# Altium PCB simrig_controller.PcbDoc
Units mm, origin at the board's own origin, x right, y up, seen from the top; angles counter-clockwise.
Board outline 48 x 48.43 mm, 4 copper layers (L1 (Signal), L2 (GND), L3 (GND), L4 (Signal)), stack 1.591 mm thick; 40 components, 38 nets, 186 pads, 76 vias.
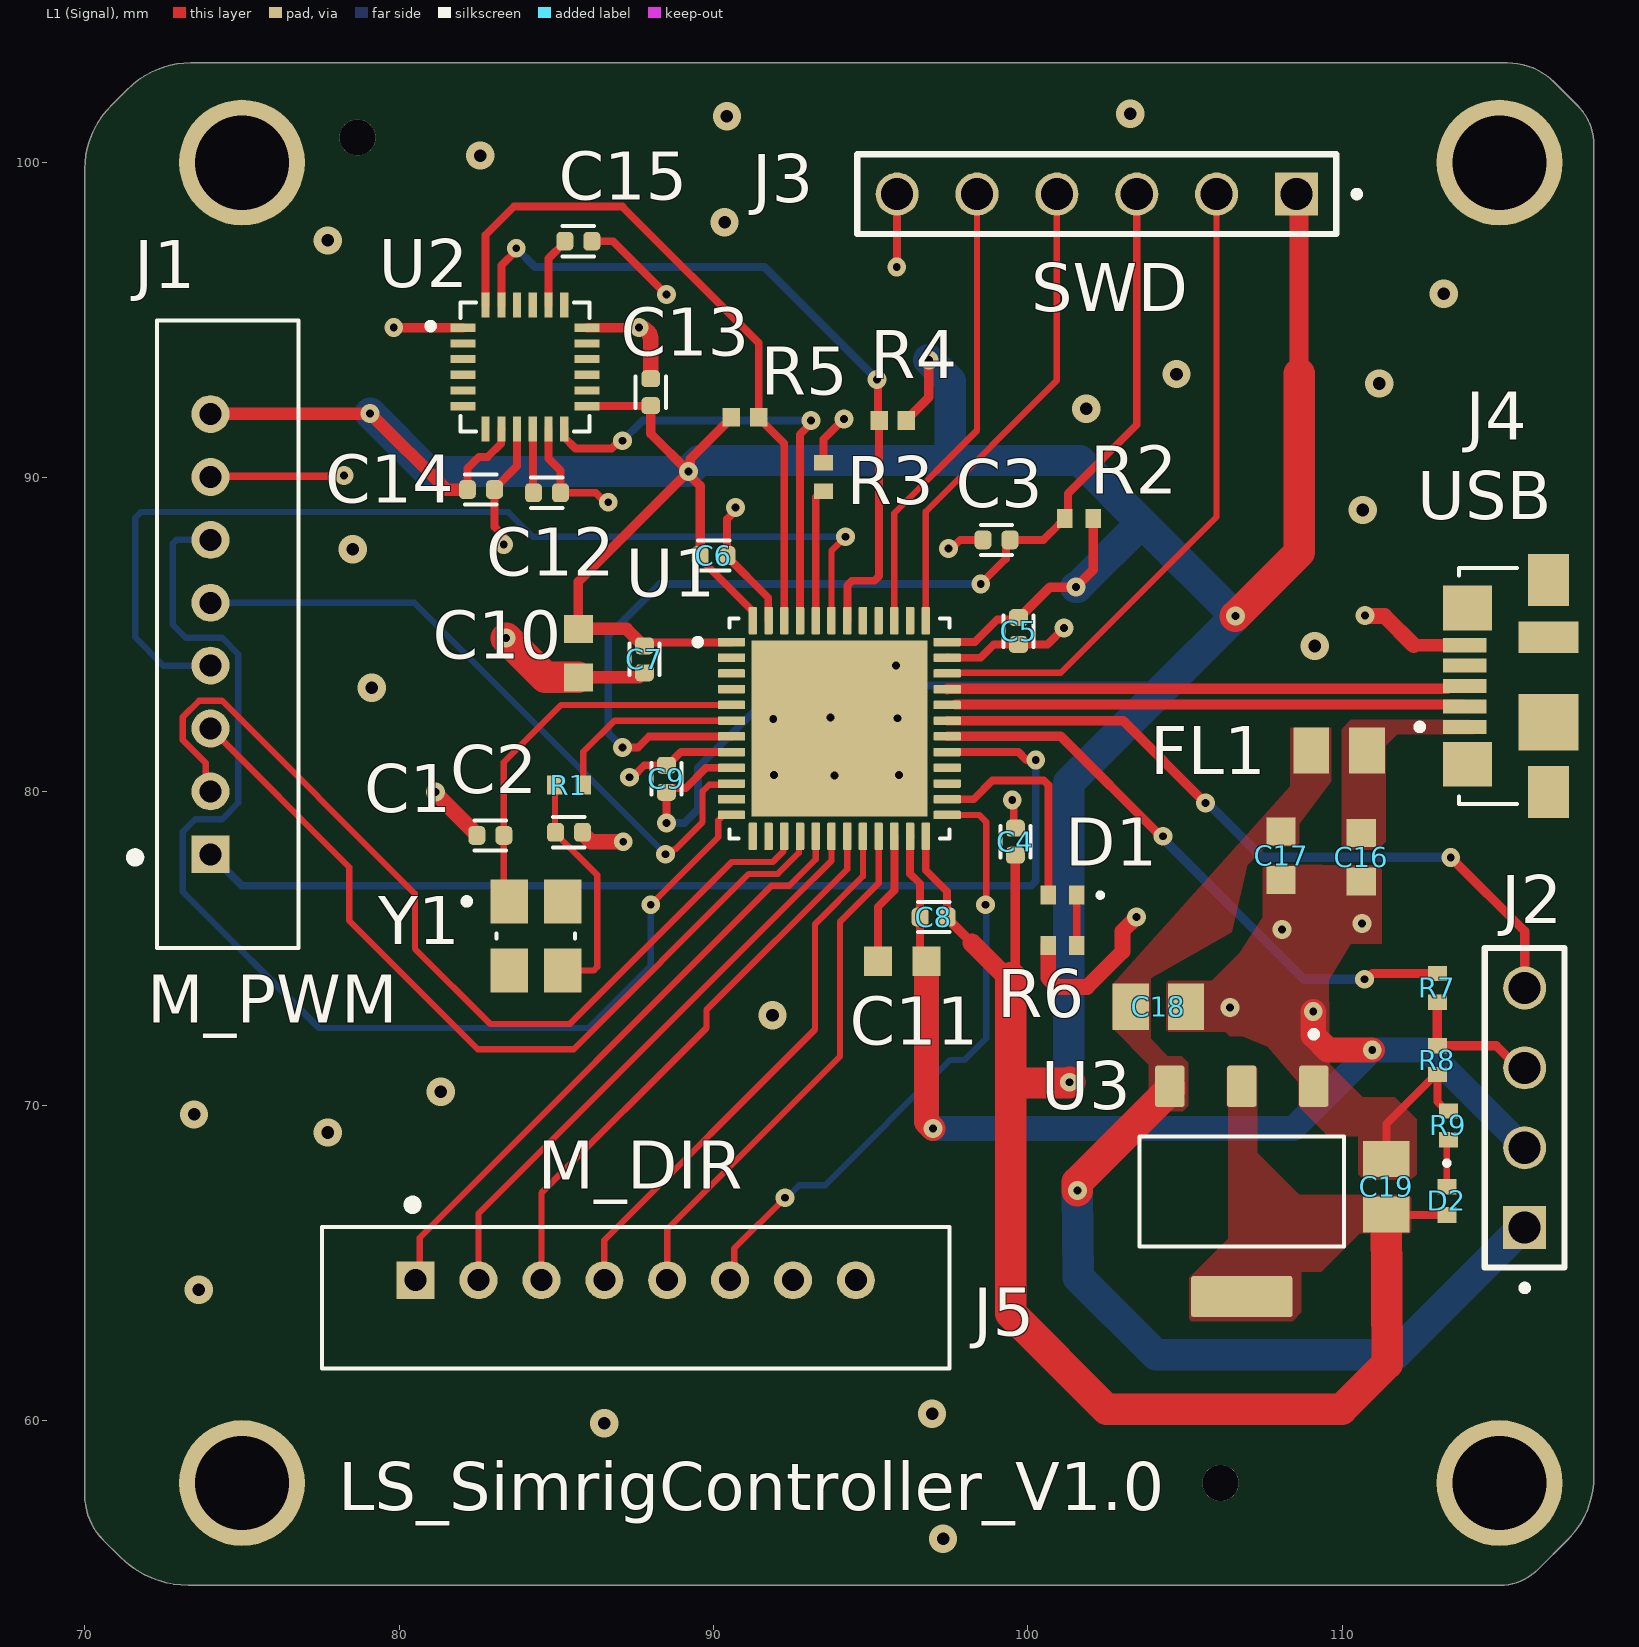
[diagram p0: L1 (Signal) view]
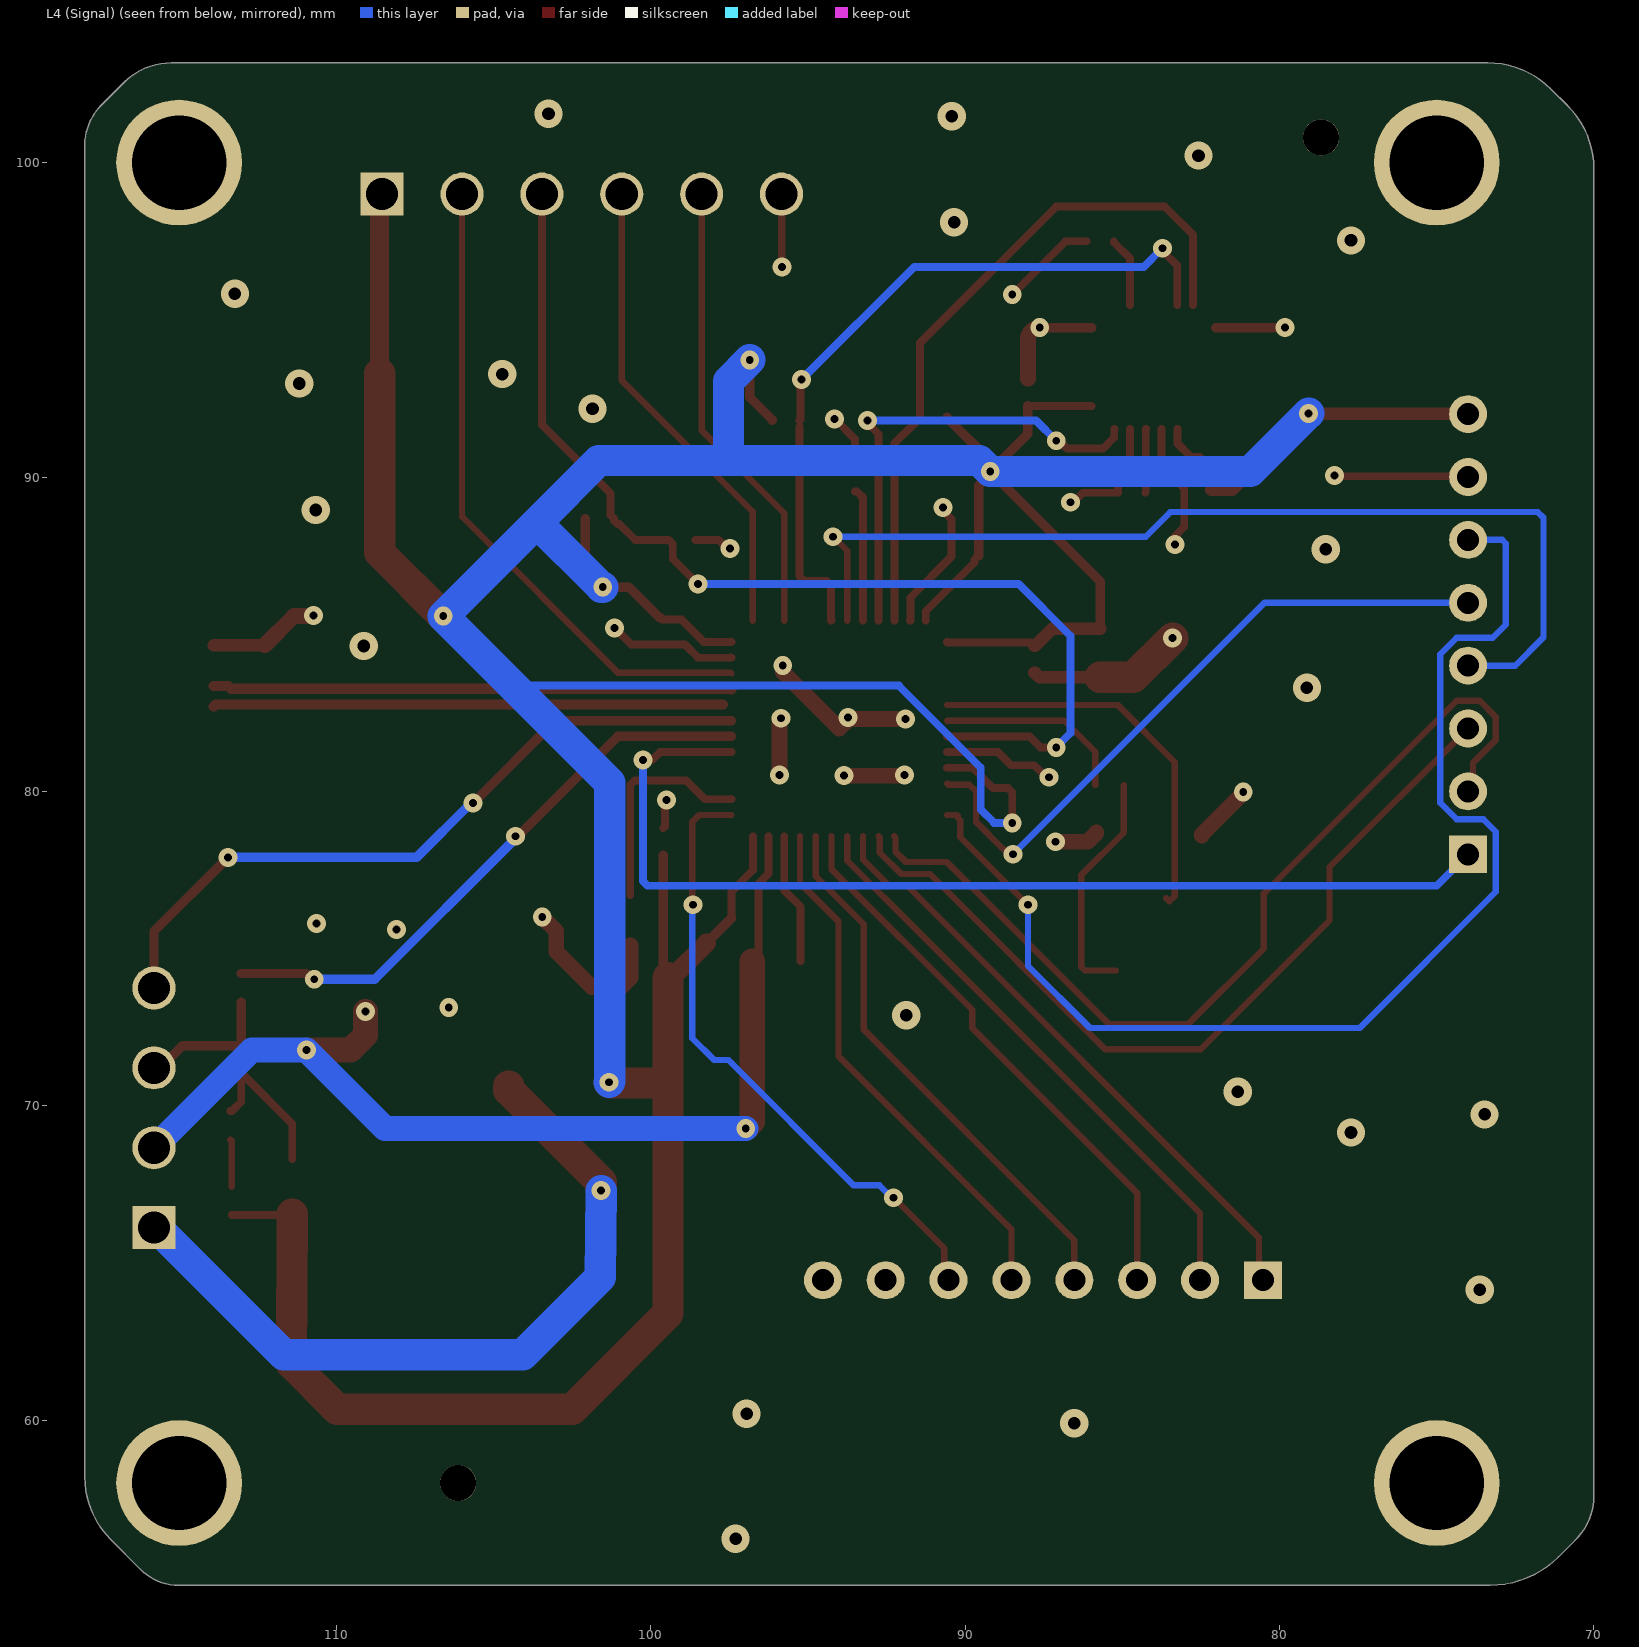
[diagram p1: L4 (Signal) view, seen from below]
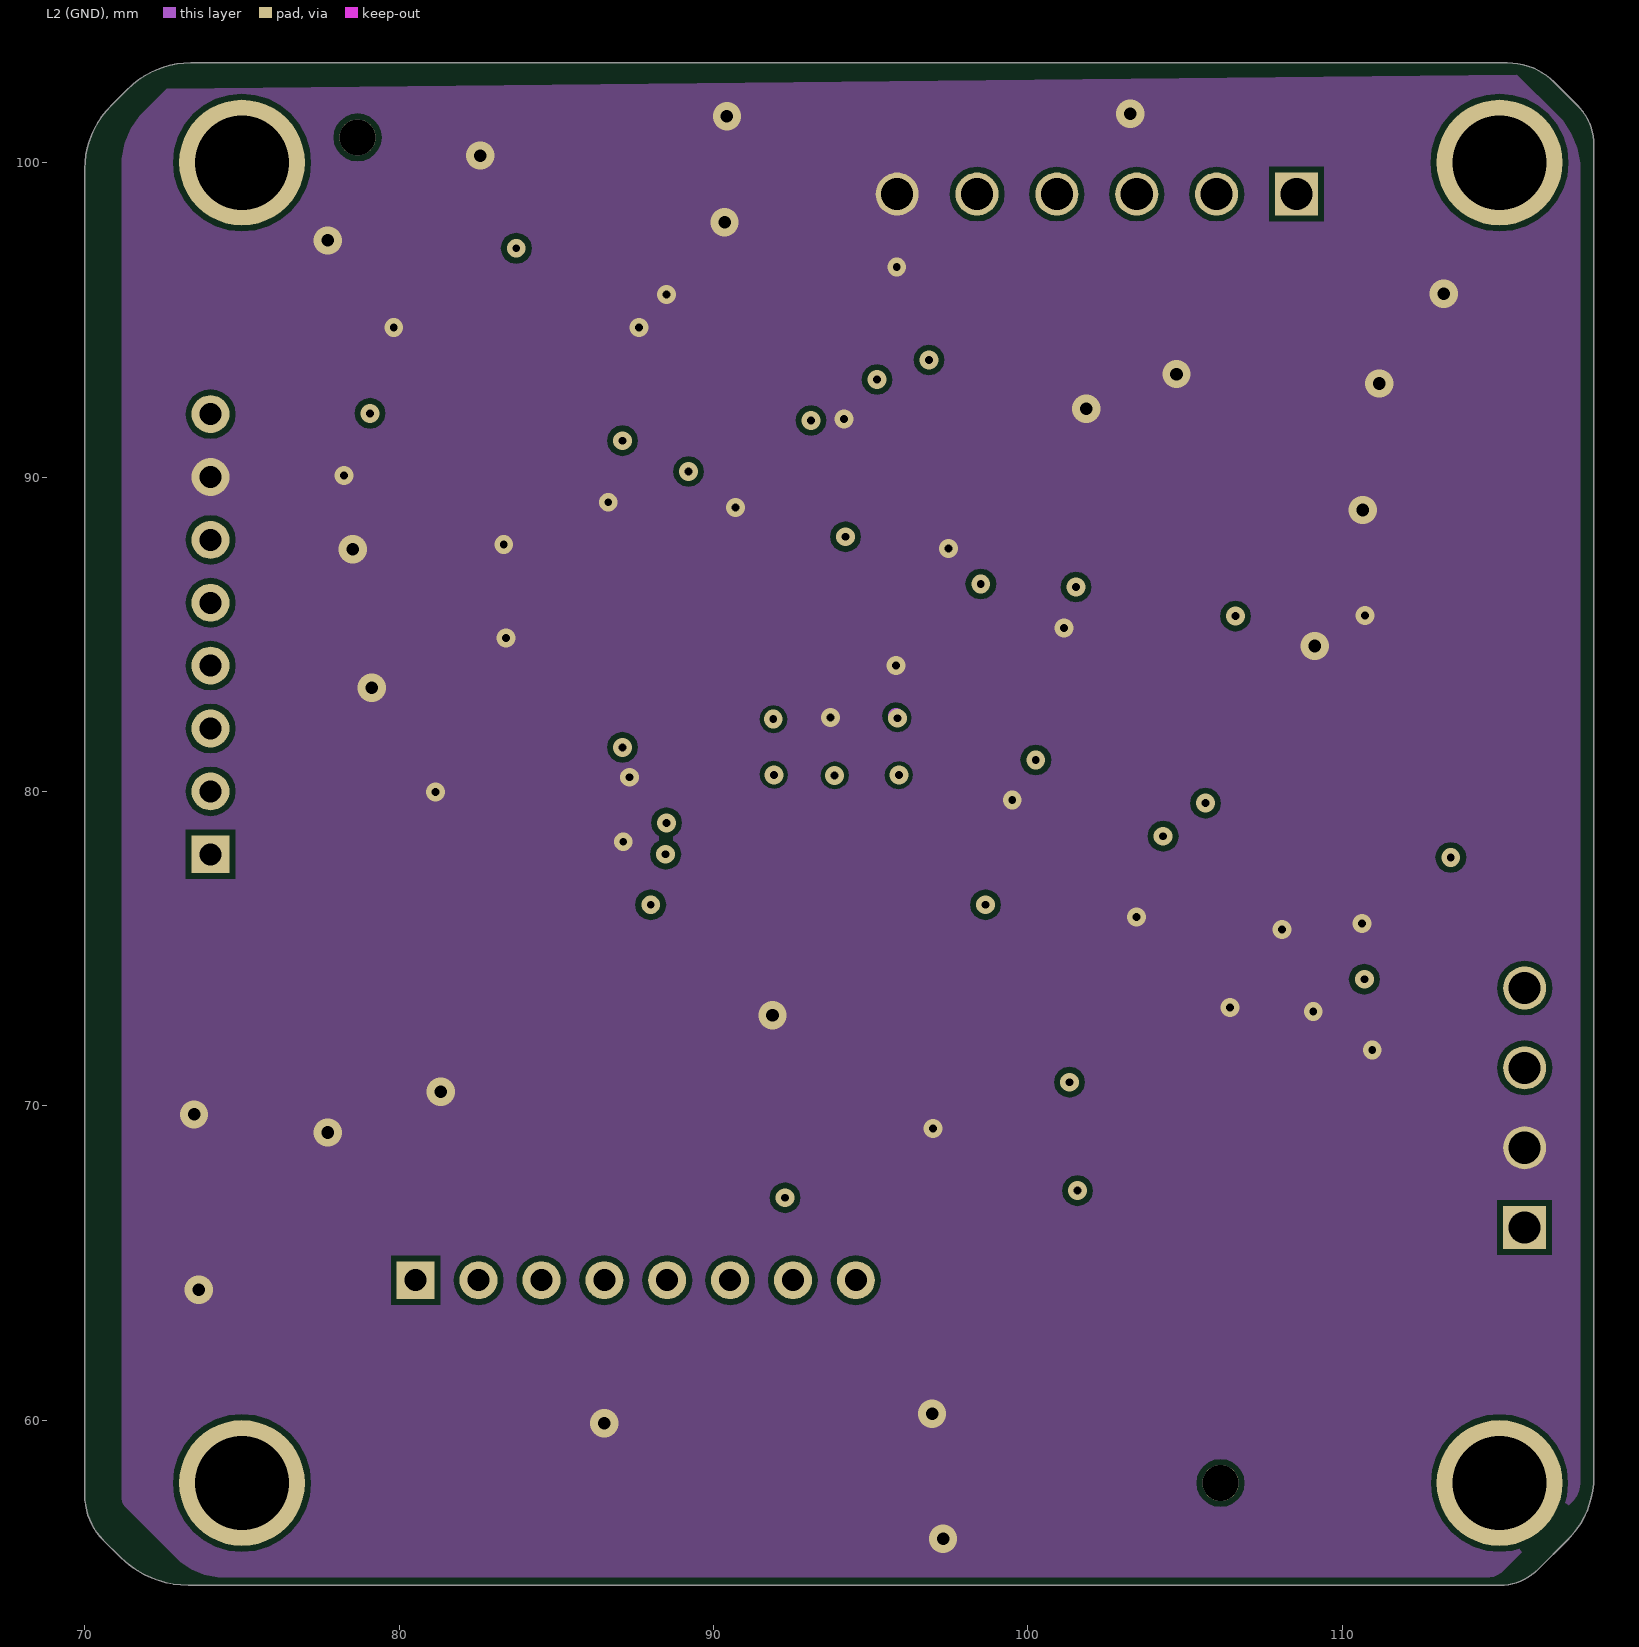
[diagram p2: L2 (GND)]
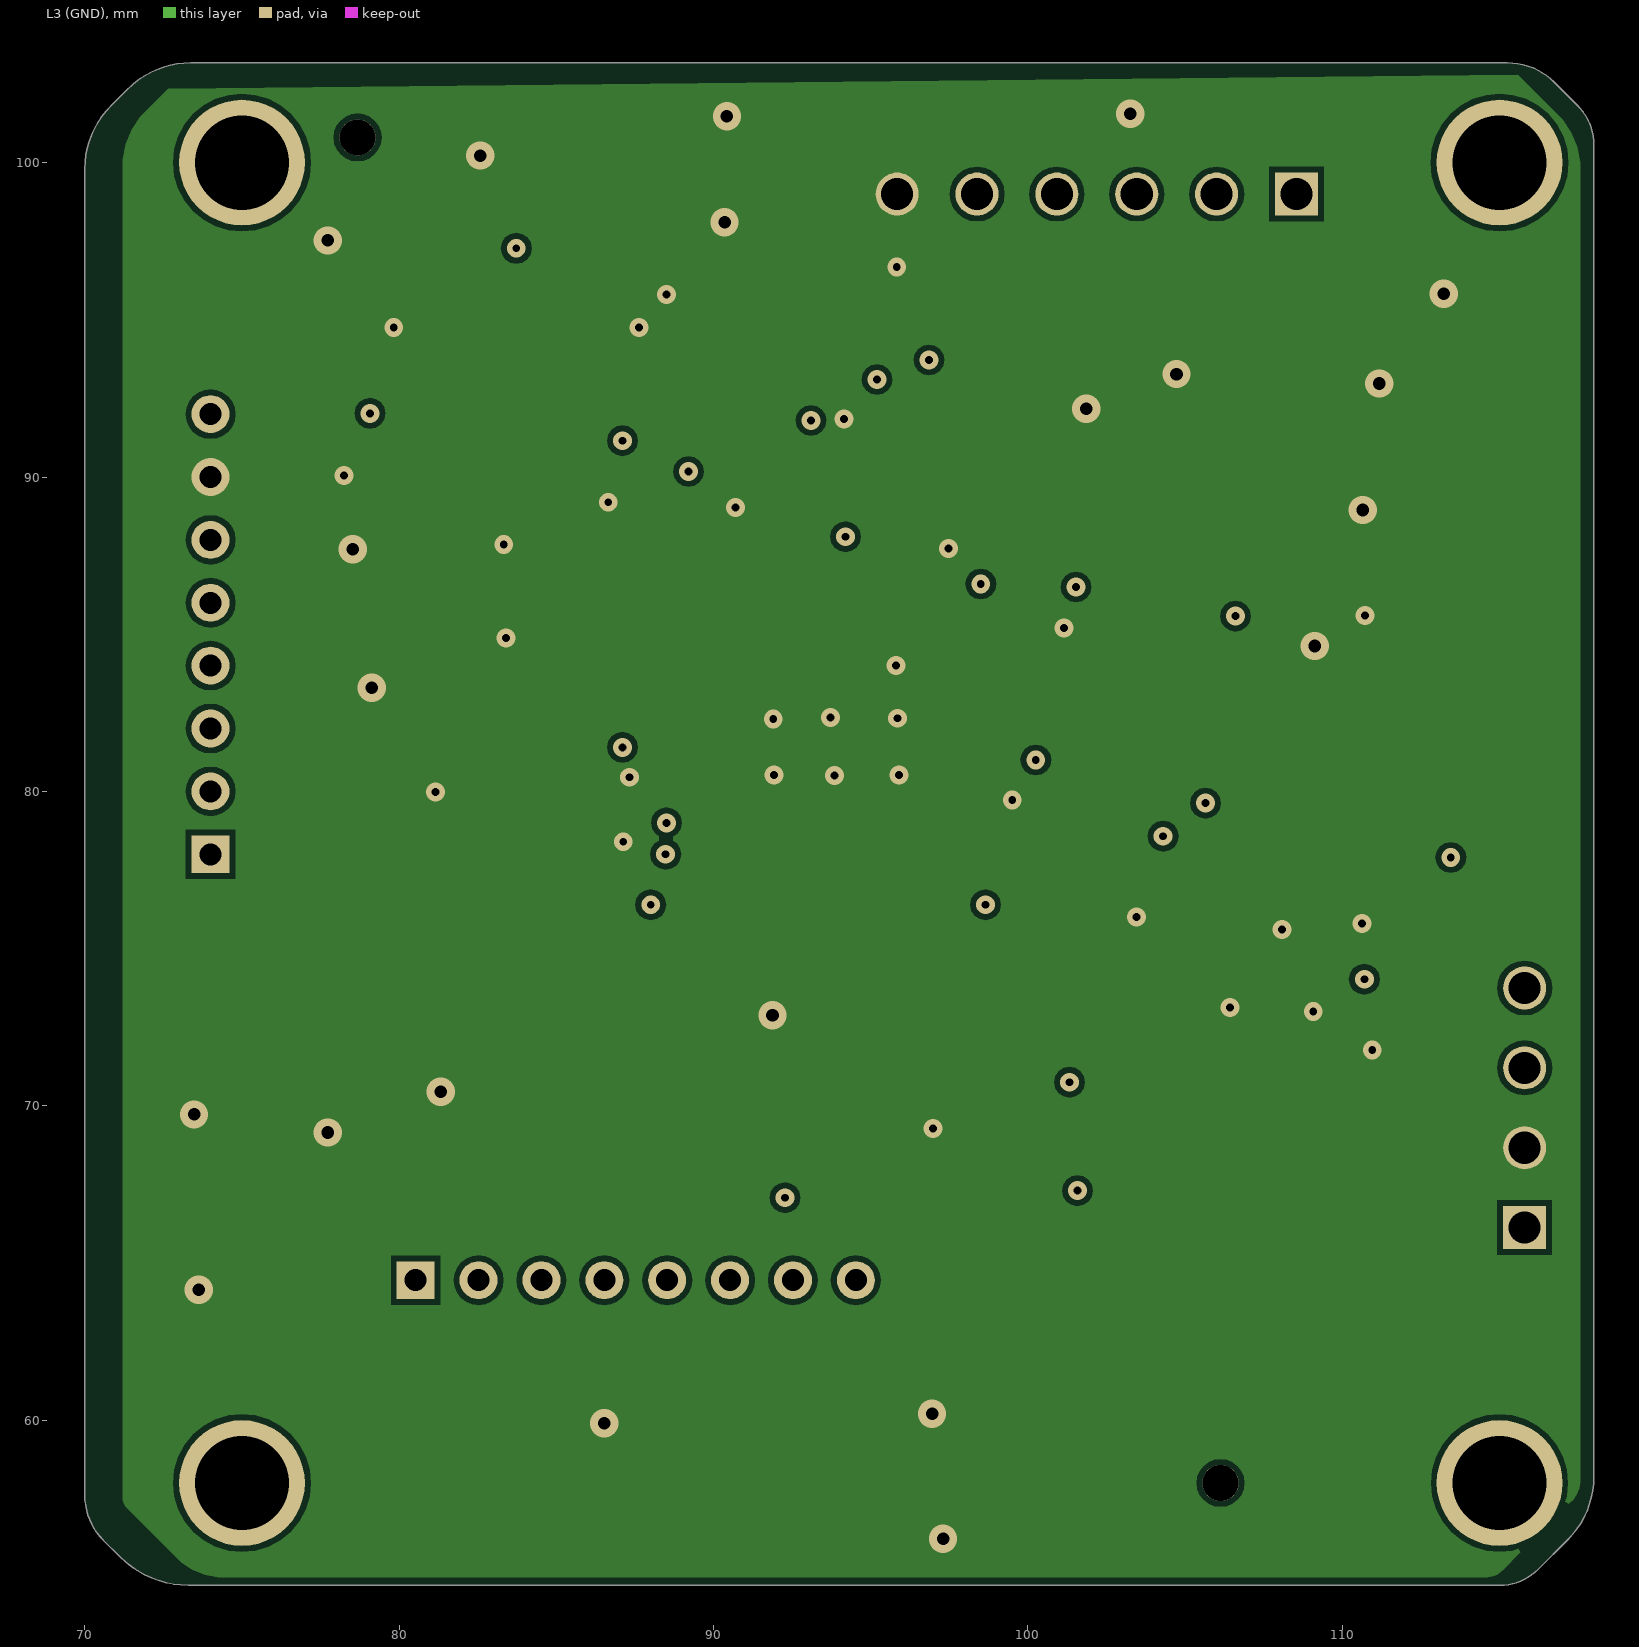
[diagram p3: L3 (GND)]
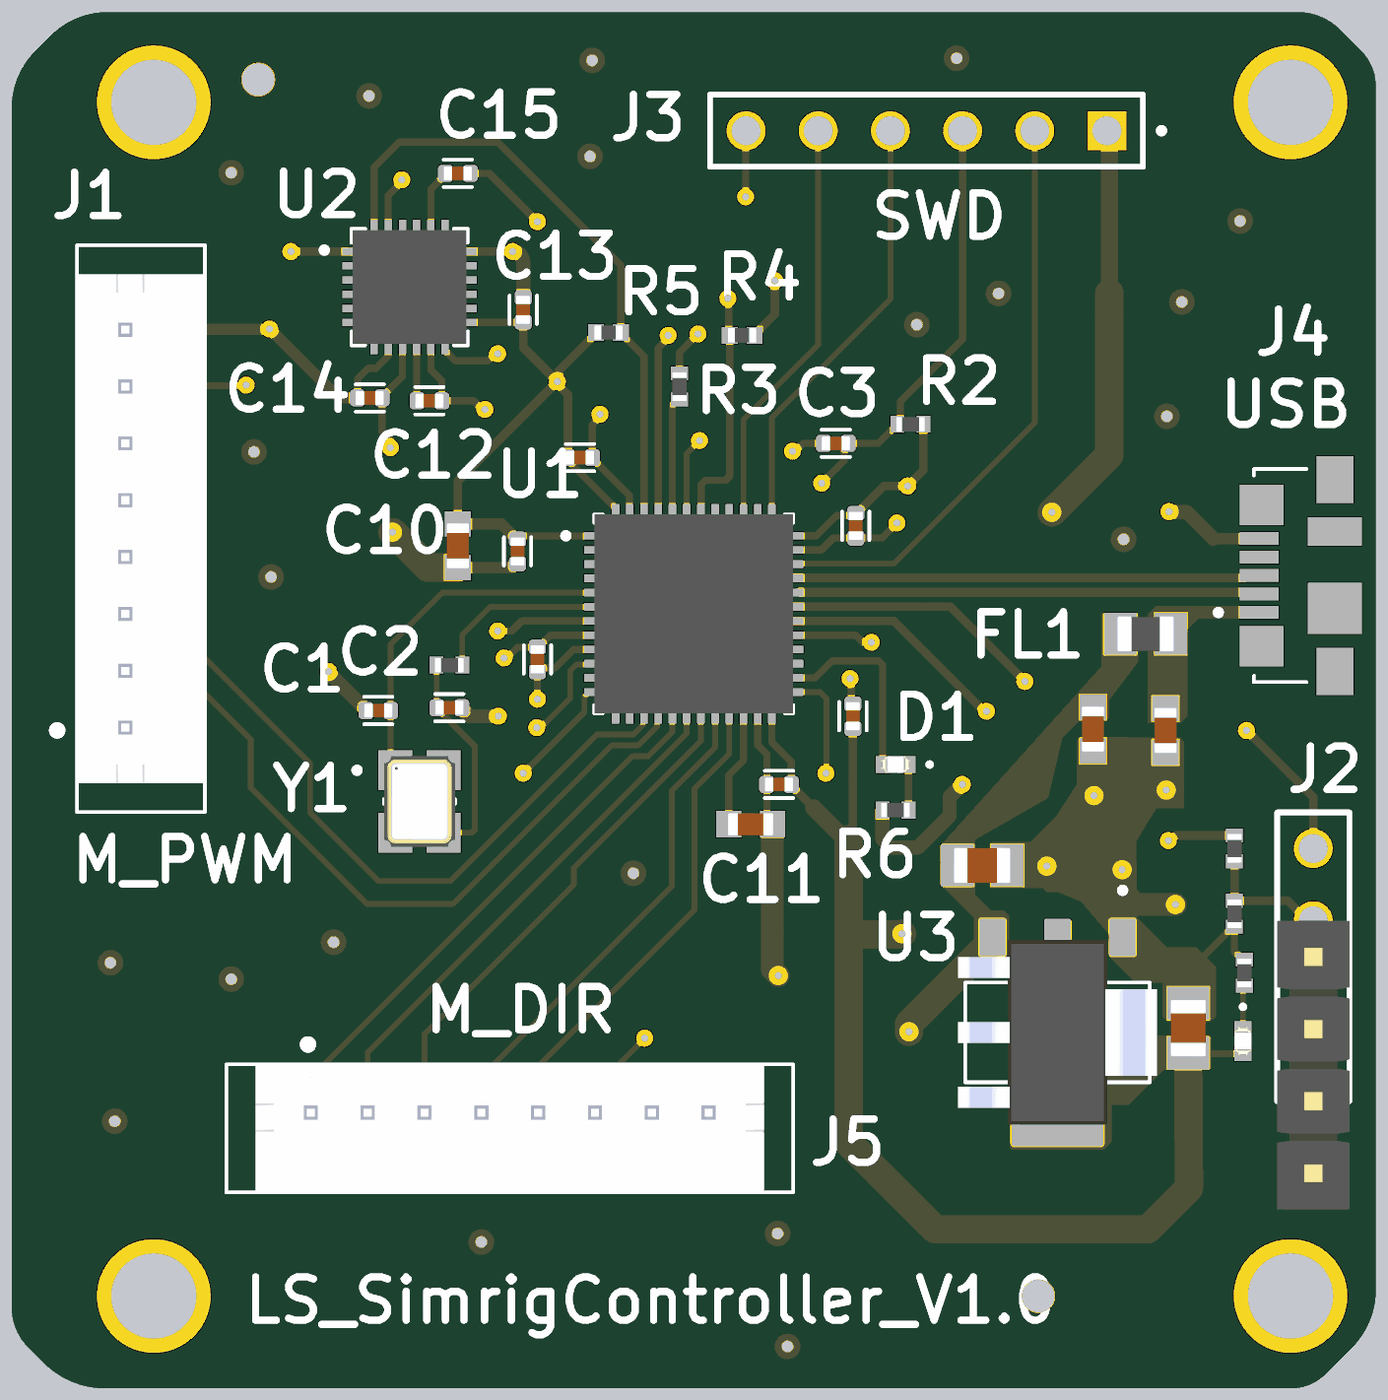
[diagram p4: 3D render of the assembled board from above, using the file's embedded part models]

## Layer stack, top to bottom
Top Solder: solder mask 0.0254, SM-001, Dk 4
L1 (Signal): signal copper 0.035
Dielectric 1: prepreg 0.2104, PP-017, Dk 4.6
L2 (GND): signal copper 0.0175
Dielectric 3: core 1.065, Core-039, Dk 4.6
L3 (GND): signal copper 0.0175
Dielectric 5: prepreg 0.2104, PP-017, Dk 4.6
L4 (Signal): signal copper 0.035
Bottom Solder: solder mask 0.0254, SM-001, Dk 4

## Board outline
70.583,56.192 71.127,55.648 ccw(c73.295,57.816) 73.295,54.75 115.014,54.75 ccw(c115.014,56.466) 116.228,55.253 117.169,56.194 ccw(c115.163,58.2) 118,58.2 118,100.558 ccw(c116.208,100.558) 117.475,101.825 116.744,102.556 ccw(c115.25,101.063) 115.25,103.175 73.375,103.175 ccw(c73.375,100.338) 71.369,102.344 70.831,101.806 ccw(c72.837,99.8) 70,99.8 70,95 70,57.6 ccw(c71.992,57.6)

## Design rules (kind name [scope] priority, off if disabled: settings)
Clearance [All] p1: gap=0.18 ignorepadtopadclearanceinfootprint=FALSE
DiffPairsRouting [All] p1: maxlimit=0.254 minlimit=0.18 mostfreqgap=0.254 toplayer_maxgap=0.203 toplayer_prefgap=0.203 toplayer_minwidth=0.322 toplayer_maxwidth=0.322 toplayer_prefwidth=0.322 bottomlayer_maxgap=0.203 bottomlayer_prefgap=0.203 bottomlayer_minwidth=0.322 bottomlayer_maxwidth=0.322 bottomlayer_prefwidth=0.322 impedanceprofiledriven=TRUE impedanceprofileid={122CBBAE-A731-4727-B2A4-EC5224EE4BFE} impedanceprofilevalue=90.000000 maxuncoupledlength=12.7
PolygonConnect [All] p1: connectstyle=Direct reliefconductorwidth=0.254 reliefentries=4 polygonreliefangle="90 Angle" airgapwidth=0.254
RoutingVias [All] p1: holewidth=0.3 width=0.7 viastyle="Through Hole" minholewidth=0.25 minwidth=0.55 maxholewidth=0.4 maxwidth=0.9
SolderMaskExpansion [All] p1: expansion=0.038 istentingtop=FALSE
UnRoutedNet [All] p1: checkbadconnections=TRUE
Width [All] p1: maxlimit=1 minlimit=0.2 preferedwidth=0.3 minimp=50.000000 maximp=50.000000 favimp=50.000000
28 further rules are at their usual default settings.

## Classes and differential pairs
net class DIFF_USB: USB_D_N USB_D_P
differential pair USB_D: +USB_D_P -USB_D_N

## Components (designator, comment, footprint, x,y, rotation, side; value= is the part's Value field where it differs from the comment)
C1 "10pF" CAPC1005X55N 82.9,78.6 r180 top
C2 "10pF" CAPC1005X55N 85.4,78.7 r0 top
C3 "0.1uF" CAPC1005X55N 99,88 r0 top
C4 "0.1u" CAPC1005X55N 99.6,78.4 r90 top
C5 "0.1u" CAPC1005X55N 99.7,85.1 r270 top
C6 "0.1u" CAPC1005X55N 90,87.5 r0 top
C7 "0.1u" CAPC1005X55N 87.8,84.2 r270 top
C8 "0.1u" CAPC1005X55N 97,76 r180 top
C9 "0.1u" CAPC1005X55N 88.5,80.4 r90 top
C10 "2u2" CAPC1608X90N 85.7,84.4 r90 top
C11 "2u2" CAPC1608X90N 96,74.6 r180 top
C12 "0.1u" CAPC1005X55N 84.7,89.5 r180 top
C13 "0.1u" CAPC1005X55N 88,92.7 r90 top
C14 "0.1u" CAPC1005X55N 82.6,89.6 r0 top
C15 "2n2" CAPC1005X55N 85.7,97.5 r0 top
C16 "2u2" CAPC1608X90N 110.6,77.9 r270 top
C17 "2u2" CAPC1608X90N 108.05,77.95 r270 top
C18 "22u" CAPC2012X145N 104.15,73.15 r0 top
C19 "22u" CAPC2012X145N 111.4,67.425 r90 top
D1 "SML-P11UTT86R" LED_SML-P11UTT86R 101.1,76.7 r180 top
D2 "GREEN" LED_SML-P11UTT86R 113.325,66.975 r270 top
FL1 "BLM21AG121SN1D" BEADC2012X105N 109.9,81.3 r180 top
J1 "B8B-PH-K-S(LF)(SN)" JST_B8B-PH-K-S(LF)(SN) 74,78 r90 top
J2 "DW-04-11-G-S-425" SAMTEC_DW-04-11-G-S-425 115.8,66.125 r90 top
J3 "HW-06-09-F-S-275-110" SAMTEC_HW-06-09-F-S-275-110 108.54,99 r180 top
J4 "47346-0001" MOLEX_47346-0001 116.56,83.35 r90 top
J5 "B8B-PH-K-S(LF)(SN)" JST_B8B-PH-K-S(LF)(SN) 80.525,64.45 r0 top
R1 "0R" RESC1005X37N 85.4,80.2 r180 top
R2 "10k" RESC1005X37N 101.625,88.675 r180 top
R3 "10k" RESC1005X37N 93.5,90 r90 top
R4 "2k2" RESC1005X35N 95.7,91.8 r0 top
R5 "2k2" RESC1005X35N 91,91.9 r180 top
R6 "1k" RESC1005X37N 101.1,75.1 r0 top
R7 "1k" RESC1005X37N 113.025,73.75 r90 top
R8 "2k" RESC1005X37N 113.025,71.45 r270 top
R9 "1k" RESC1005X37N 113.375,69.375 r90 top
U1 "STM32F411CEU6" QFN50P700X700X60-49N 94,82 r0 top
U2 "MPU-6050" QFN50P400X400X95-24N 84,93.5 r0 top
U3 "AMS1117-3.3" SOT229P700X180-4N 106.8,67.275 r270 top
Y1 "24MHz" XTAL_7V24000002 84.35,75.4 r0 top

## Footprints (in the part's own frame and the unit in brackets; to place one, negate y for a bottom-side part, rotate by r counter-clockwise, add the part's x,y. Pads: shape width x height; smd on the part's side, far side on the other; paste and mask are expansions set on the pad)
BEADC2012X105N [mm]
  rect 1.14x1.47 smd: 1(-0.89,0) 2(0.89,0)
  body extent -1,-0.63 1,0.63, height 1.05
CAPC1005X55N [mm]
  rrect53% 0.54x0.6 smd: 1(-0.43,0) 2(0.43,0)
  silkscreen extent -0.5,-0.48 0.5,0.48, body extent -0.5,-0.25 0.5,0.25, height 0.55
CAPC1608X90N [mm]
  rect 0.89x0.93 smd: 1(-0.77,0) 2(0.77,0)
  body extent -0.8,-0.4 0.8,0.4, height 0.9
CAPC2012X145N [mm]
  rect 1.15x1.47 smd: 1(-0.88,0) 2(0.88,0)
  body extent -1,-0.63 1,0.63, height 1.45
JST_B8B-PH-K-S(LF)(SN) [mm]
  rect 1.208x1.208 hole 0.7: 1(0,0)
  round 1.208 hole 0.7: 2(2,0) 3(4,0) 4(6,0) 5(8,0) 6(10,0) 7(12,0) 8(14,0)
  silkscreen extent -2.98,-2.8 16.98,2.54, body extent -1.95,-2.8 15.95,1.7, height 6
LED_SML-P11UTT86R [mm]
  rect 0.5x0.6 smd: A(0.45,0) C(-0.45,0)
  silkscreen extent -1.25,-0.05 -1.15,0.05, body extent -0.5,-0.3 0.5,0.3, height 0.21
MOLEX_47346-0001 [mm]
  rect 0.45x1.38 smd: 1(-1.3,2.66) 2(-0.65,2.66) 3(0,2.66) 4(0.65,2.66) 5(1.3,2.66)
  rect 1.425x1.55 smd: S1(-2.488,2.575) S2(2.488,2.575)
  rect 1.65x1.3 smd: S3(-3.375,0) S6(3.375,0)
  rect 1.8x1.9 smd: S4(-1.15,0)
  rect 1x1.9 smd: S5(1.55,0)
  silkscreen extent -3.75,1 3.75,4.2
QFN50P400X400X95-24N [mm]
  rect 0.79x0.26 smd: 1(-1.97,1.25) 2(-1.97,0.75) 3(-1.97,0.25) 4(-1.97,-0.25) 5(-1.97,-0.75) 6(-1.97,-1.25) 13(1.97,-1.25) 14(1.97,-0.75) 15(1.97,-0.25) 16(1.97,0.25) 17(1.97,0.75) 18(1.97,1.25)
  rect 0.26x0.79 smd: 7(-1.25,-1.97) 8(-0.75,-1.97) 9(-0.25,-1.97) 10(0.25,-1.97) 11(0.75,-1.97) 12(1.25,-1.97) 19(1.25,1.97) 20(0.75,1.97) 21(0.25,1.97) 22(-0.25,1.97) 23(-0.75,1.97) 24(-1.25,1.97)
  silkscreen extent -3.1,-2.05 2.05,2.05, body extent -2,-2 2,2, height 0.93
QFN50P700X700X60-49N [mm]
  rrect25% 0.87x0.27 smd: 1(-3.43,2.75) 2(-3.43,2.25) 3(-3.43,1.75) 4(-3.43,1.25) 5(-3.43,0.75) 6(-3.43,0.25) 7(-3.43,-0.25) 8(-3.43,-0.75) 9(-3.43,-1.25) 10(-3.43,-1.75) 11(-3.43,-2.25) 12(-3.43,-2.75) 25(3.43,-2.75) 26(3.43,-2.25) 27(3.43,-1.75) 28(3.43,-1.25) 29(3.43,-0.75) 30(3.43,-0.25) 31(3.43,0.25) 32(3.43,0.75) 33(3.43,1.25) 34(3.43,1.75) 35(3.43,2.25) 36(3.43,2.75)
  rrect25% 0.27x0.87 smd: 13(-2.75,-3.43) 14(-2.25,-3.43) 15(-1.75,-3.43) 16(-1.25,-3.43) 17(-0.75,-3.43) 18(-0.25,-3.43) 19(0.25,-3.43) 20(0.75,-3.43) 21(1.25,-3.43) 22(1.75,-3.43) 23(2.25,-3.43) 24(2.75,-3.43) 37(2.75,3.43) 38(2.25,3.43) 39(1.75,3.43) 40(1.25,3.43) 41(0.75,3.43) 42(0.25,3.43) 43(-0.25,3.43) 44(-0.75,3.43) 45(-1.25,3.43) 46(-1.75,3.43) 47(-2.25,3.43) 48(-2.75,3.43)
  rect 5.6x5.6 smd paste-4: 49(0,0)
  silkscreen extent -4.6,-3.5 3.5,3.5, body extent -3.5,-3.5 3.5,3.5, height 0.6
RESC1005X35N [mm]
  rect 0.56x0.6 smd: 1(-0.435,0) 2(0.435,0)
  body extent -0.5,-0.25 0.5,0.25, height 0.35
RESC1005X37N [mm]
  rect 0.49x0.6 smd: 1(-0.457,0) 2(0.457,0)
  body extent -0.5,-0.25 0.5,0.25, height 0.37
SAMTEC_DW-04-11-G-S-425 [mm]
  rect 1.37x1.37 hole 1.02: 01(0,0)
  round 1.37 hole 1.02: 02(2.54,0) 03(5.08,0) 04(7.62,0)
  silkscreen extent -2.02,-1.27 8.89,1.27, body extent -5.08,-1.27 5.08,1.27, height 20.83
SAMTEC_HW-06-09-F-S-275-110 [mm]
  rect 1.37x1.37 hole 1.02: 01(0,0)
  round 1.37 hole 1.02: 02(2.54,0) 03(5.08,0) 04(7.62,0) 05(10.16,0) 06(12.7,0)
  silkscreen extent -2.02,-1.27 13.97,1.27
SOT229P700X180-4N [mm]
  rrect15% 1.31x0.93 smd: 1(-3.345,2.29) 2(-3.345,0) 3(-3.345,-2.29)
  rrect15% 1.31x3.24 smd: 4(3.345,0)
  silkscreen extent -5.1,-3.25 1.75,3.25, body extent -3.25,-3.5 3.25,3.5, height 1.8
XTAL_7V24000002 [mm]
  rect 1.2x1.4 smd: 1(-0.85,1.1) 2(-0.85,-1.1) 3(0.85,-1.1) 4(0.85,1.1)
  silkscreen extent -2.3,-0.08 1.25,1.2, body extent -1.25,-1.6 1.25,1.6, height 0.9

## Part data
C1 C2: library part CC0402JRNPO9BN100, "CERAMIC CAPACITOR 10PF 50V, C0G, 5%, 0402, FULL REEL", Package=None, Availability=Unavailable, MF="{'manufacturer': u'Yageo'}", MP=CC0402JRNPO9BN100, Price=None
C3 C4 C5 C6 C7 C8 C9 C12 C13 C14 C15: library part C0402C104K4RALTU, "CAP CER 0.1UF 16V 10% X7R 0402", Package=None, Availability=Unavailable, MF="{'manufacturer': u'KEMET'}", MP=C0402C104K4RALTU, Price=None
C10 C11 C16 C17: library part GRM188R61E225MA12D, Package=None, Availability=Unavailable, MF="{'manufacturer': u'Murata'}", MP=GRM188R61E225MA12D, Price=None
C18 C19: library part C2012X6S1C226M125AC, "22ÂµF Â±20% 16V Ceramic Capacitor X6S 0805 (2012 Metric)", Package=None, Availability=Unavailable, MF="{'manufacturer': u'TDK'}", MP=C2012X6S1C226M125AC, Price=None
D1: "LED, PICOLED, Red, 621 nm, 1.8 V, 1 mA, 2.5 mcd", Package=None, Availability=Unavailable, MF="{'manufacturer': u'Rohm'}", MP=SML-P11UTT86R, Price=None
D2: library part SML-P12PTT86, "LED Uni-Color Green 2-Pin SMD T/R", Package=None, Availability=Unavailable, MF="{'manufacturer': u'Rohm'}", MP=SML-P12PTT86, Price=None
FL1: "FERRITE BEAD, 0805 CASE, 120OHM; Inductor Type:Ferrite Bead; Series:BLM21; Resistance:0.15ohm; DC Current Max:200mA; Case Style:0805; Core Material:Ferrite; Temp, Op. Max:+125Â°C; Temp, Op. Min:-55Â°C; Typ Impedance @ 100MHz:120ohm", Package=None, Availability=Unavailable, MF="{'manufacturer': u'Murata'}", MP=BLM21AG121SN1D, Price=None
J1 J5: "PH Series 2 mm Pitch 8 Position Through Hole Top Entry Shrouded Header", Package=None, Availability=Unavailable, MF="{'manufacturer': u'JST Sales'}", MP=B8B-PH-K-S(LF)(SN), Price=None
J2 J3 U3: Package=None, Availability=Unavailable, Price=None
  J2: MF="{'manufacturer': u'Samtec'}", MP=DW-04-11-G-S-425
  J3: MF="{'manufacturer': u'Samtec'}", MP=HW-06-09-F-S-275-110
  U3: MF="{'manufacturer': u'ams AG'}", MP=AMS1117-3.3
J4: "USB Connectors MICRO USB B RECPT BTTM MOUNT ASSY", Package=None, Availability=Unavailable, MF="{'manufacturer': u'Molex'}", MP=47346-0001, Price=None
R1 R2 R3 R6 R7 R8 R9: library part MCS04020D1002BE000, Package=None, Availability=Unavailable, MF="{'manufacturer': u'Vishay'}", MP=MCS04020D1002BE000, Price=None
R4 R5: library part RT0402BRB072K2L, "RES SMD 2.2K OHM 0.1% 1/16W 0402", Package=None, Availability=Unavailable, MF="{'manufacturer': u'Yageo'}", MP=RT0402BRB072K2L, Price=None
U1: "High-performance access line, ARM Cortex-M4 core with DSP and FPU, 512 Kbytes Flash, 100 MHz CPU, ART Accelerator", Package=None, Availability=Unavailable, MF="{'manufacturer': u'STMicroelectronics'}", MP=STM32F411CEU6, Price=None
U2: "MPU-6050 Six-Axis (Gyro + Accelerometer) MEMS MotionTrackingâ„¢ Devices", Package=None, Availability=Unavailable, MF="{'manufacturer': u'TDK InvenSense'}", MP=MPU-6050, Price=None
Y1: library part 7V24000002, Package=None, Availability=Unavailable, MF="{'manufacturer': u'TXC CORPORATION'}", MP=7V24000002, Price=None

## Free pads (board coordinates)
  round 4 hole 3: 1(75,100) 2(75,58) 3(115,100) 4(115,58)
  round 1.152 hole 1.152: TH(78.675,100.8) TH(106.125,58)

## Via types
v1: diameter 0.6, hole 0.25, L1 (Signal) to L4 (Signal), 55 vias
v2: diameter 0.9, hole 0.4, L1 (Signal) to L4 (Signal), tented both sides, 21 vias

## Nets (pads, with @x,y where several pads share a name; then routed paths per layer and width w, separated by ;. In a path a pad name is that pad's centre, name@x,y a point inside that pad or via, vN(x,y) a via of type N, cw(c..) or ccw(c..) an arc to the next point about the centre after c; other vN are vias at no path point)
+3V3: C4.1 C5.1 C6.1 C7.1 C8.1 C9.1 C10.2 C13.1 C14.1 C19.1 D2.A J1.8 J3.01 R2.1 R4.2 R5.2 U1.1 U1.9 U1.24 U1.36 U1.48 U2.8 U2.13 U3.2 U3.4 | length 178.1
  L1 (Signal) w0.25: C14.1 82.17,90.275 82.537,90.642 82.818,90.642 83.245,91.069 83.245,91.525 U2.8 ; U2.13 85.975,92.255 87.985,92.255 C13.1 ; C7.1 87.91,84.74 90.56,84.74 U1.1 ; v1(88.5,79) C9.1 88.634,80.104 89.114,80.104 89.76,80.75 U1.9 ; C6.1 89.704,87.366 89.704,87.276 91.25,85.73 U1.48 ; U1.24 96.75,77.49 97.43,76.81 C8.1 ; U1.36 98.31,84.75 99.025,85.465 99.635,85.465 C5.1 ; C19.1 111.42,66.525 D2.A
  L1 (Signal) w0.3: C10.2 85.7,86.675 v1(89.2,90.175) ; C13.1 88,91.375 v1(89.2,90.175) ; C6.1 89.57,89.724 89.2,90.094 v1(89.2,90.175) ; R5.2 90.565,91.88 89.257,90.572 89.257,90.232 v1(89.2,90.175) ; R4.2 96.135,91.82 96.85,92.535 v1(96.85,93.725) ; C8.1 97.43,75.97 98.225,75.175 ; 99.325,74.075 99.6,74.35 C4.1 ; C5.1 99.73,85.53 100.7,86.5 v1(101.525,86.5) 102.082,87.057 R2.1
  L1 (Signal) w0.4: J1.8 74.012,92.012 79.062,92.012 v1(79.075,92.025) 81.5,89.6 C14.1 ; C10.2 87.23,85.17 87.77,84.63 C7.1
  L1 (Signal) w0.6: 98.225,75.175 99.325,74.075 99.45,74.075 ; J3.01 108.625,98.915 108.625,93.292
  L1 (Signal) w1: 99.45,74.075 99.45,70.725 ; v1(101.325,70.75) 101.3,70.725 99.45,70.725 ; v1(106.6,85.575) 108.625,87.6 108.625,93.292 ; C19.1 111.425,61.8 109.975,60.35 102.5,60.35 99.45,63.4 99.45,70.725
  L4 (Signal) w0.25: v1(88.5,79) 89.075,79 89.5,79.425 89.5,80.756 92.107,83.363 104.388,83.363
  L4 (Signal) w1: v1(79.075,92.025) 80.925,90.175 v1(89.2,90.175) 89.55,90.525 97.525,90.525 ; v1(96.85,93.725) 97.525,93.05 97.525,90.525 ; v1(101.325,70.75) 101.3,70.775 101.3,80.275 104.388,83.363 v1(106.6,85.575) 103.625,88.55 ; v1(101.525,86.5) 101.575,86.5 103.625,88.55 ; 97.525,90.525 101.65,90.525 103.625,88.55
+5V: C17.1 C18.1 FL1.2 J2.01 U3.3 | length 24.2
  L1 (Signal) w1: v1(101.575,67.3) 101.575,67.565 104.51,70.5 U3.3
  L4 (Signal) w1: v1(101.575,67.3) 101.6,64.55 104.075,62.075 111.675,62.075 J2.01@115.763,66.163
GND: C1.2 C2.2 C3.1 C4.2 C5.2 C6.2 C7.2 C8.2 C9.2 C10.1 C11.1 C12.1 C13.2 C14.2 C15.2 C16.2 C17.2 C18.2 C19.2 J1.7 J2.02 J3.06 J4.5 R3.2 R6.1 R8.2 R9.2 U1.8 U1.23 U1.35 U1.47 U1.49 U2.1 U2.9 U2.11 U2.18 U3.1 | length 103.5
  L1 (Signal) w0.25: J1.7 74.025,90.025 78.225,90.025 v1(78.25,90.05) ; v1(83.325,87.85) 83.325,88.12 83.03,88.415 C14.2 83.03,89.63 83.75,90.35 U2.9 ; U2.11 84.75,90.59 85.13,90.21 C12.1 86.25,89.5 86.555,89.195 v1(86.65,89.195) ; C15.2 86.8,97.5 v1(88.5,95.8) ; v1(87.325,80.45) 87.42,80.45 87.8,80.83 C9.2 88.54,80.83 88.96,81.25 U1.8 U1.8@90.56,81.26 ; v1(90.7,89.025) 90.7,88.93 90.43,88.66 C6.2 90.43,87.47 91.74,86.16 91.74,85.44 U1.47 ; R3.2 93.5,91.2 v1(94.15,91.85) ; v1(95.825,96.675) 95.832,96.682 95.832,98.992 J3.06 ; U1.23@96.26,78.56 U1.23 96.25,77.382 96.57,77.062 C8.2 96.57,74.8 C11.1 ; U1.35@97.44,84.26 U1.35 98.49,84.25 98.91,84.67 C5.2 100.62,84.67 v1(101.15,85.2) ; v1(97.475,87.725) 97.57,87.725 97.845,88 C3.1 ; v1(99.5,79.725) 99.55,79.675 99.55,78.88 C4.2 ; C19.2 111.4,69.423 112.97,70.993 R8.2 113.025,70.127 113.32,69.832 R9.2
  L1 (Signal) w0.3: v1(79.825,94.75) U2.1 ; U2.18 v1(87.625,94.75)
  L1 (Signal) w0.4: C10.1 87.63,83.63 87.77,83.77 C7.2 ; 112.275,84.65 J4.5
  L1 (Signal) w0.5: v1(81.15,79.975) 81.15,79.95 82.47,78.63 C1.2 ; C2.2 85.83,78.67 86.1,78.4 v1(87.125,78.4) ; v1(87.625,94.75) cw(c87.625,94.375) 88,94.375 C13.2 ; v1(91.9,82.3) 93.675,82.3 v1(93.725,82.35) ; v1(91.925,80.525) 91.95,80.5 v1(93.85,80.5) ; U1.49@93.688,82.313 U1.49 95.8,83.8 v1(95.8,84) ; v1(95.85,82.325) 95.9,82.275 v1(95.9,80.525) ; R6.1 100.643,74.068 100.936,73.775 101.875,73.775 103.005,74.905 103.005,75.555 v1(103.45,76) ; v1(110.725,85.6) 110.744,85.581 111.344,85.581 112.275,84.65
  L1 (Signal) w0.8: C11.1 96.77,69.48 v1(96.975,69.275) ; v1(109.075,73) 109.075,72.244 109.544,71.775 v1(110.95,71.775)
  L1 (Signal) w1: v1(83.4,84.875) 84.645,83.63 C10.1
  L2 (GND) w0.5: v1(91.9,82.3) v1@91.913,82.287 ; v1@91.913,80.537 v1(91.925,80.525) ; v1(93.85,80.5) v1@93.862,80.512 ; v1@95.8,82.402 95.85,82.352 v1(95.85,82.325) ; v1@95.887,80.512 v1(95.9,80.525)
  L4 (Signal) w0.8: v1(96.975,69.275) 108.45,69.275 v1(110.95,71.775) 112.69,71.775 J2.02
  other v1: 106.425,73.125 108.083,75.608 110.625,75.8
  other v2: 97.3,56.225 86.525,59.9 96.95,60.2 73.625,64.15 77.725,69.15 73.475,69.725 81.325,70.45 91.875,72.875 79.125,83.3 109.125,84.625 78.525,87.7 110.65,88.95 101.85,92.175 111.175,92.975 104.725,93.275 113.225,95.825 77.725,97.525 90.35,98.1 82.575,100.225 90.425,101.475 103.25,101.55
IMU_CPOUT: C15.1 U2.20 | length 2.2
  L1 (Signal) w0.25: U2.20 84.75,96.95 85.27,97.47 C15.1
IMU_INT: U1.45 U2.12 | length 15.1
  L1 (Signal) w0.25: U2.12 85.255,91.525 85.255,91.26 85.609,90.906 86.757,90.906 87.005,91.155 v1(87.1,91.155) ; U1.45 92.75,91.355 93.1,91.705 v1(93.1,91.8)
  L4 (Signal) w0.25: v1(87.1,91.155) 87.745,91.8 v1(93.1,91.8)
IMU_REGOUT: C12.2 U2.10 | length 2
  L1 (Signal) w0.25: U2.10 84.255,91.525 84.255,89.515 C12.2
IMU_SCL: R4.1 U1.42 U2.23 | length 23.5
  L1 (Signal) w0.25: U2.23 83.25,96.725 83.725,97.2 v1(83.725,97.275) ; U1.42 94.26,85.44 94.26,86.554 94.406,86.7 95.119,86.7 95.265,86.846 R4.1@95.265,91.6 ; v1(95.2,93.1) 95.232,93.067 95.232,91.832 R4.1
  L4 (Signal) w0.25: v1(83.725,97.275) 84.318,96.682 91.618,96.682 v1(95.2,93.1)
IMU_SDA: R5.1 U1.46 U2.24 | length 22.3
  L1 (Signal) w0.25: U2.24 82.75,97.702 83.648,98.6 87.1,98.6 91.435,94.265 R5.1 91.435,91.88 92.25,91.065 U1.46
LED_PWR_K: D2.C R9.1 | length 1.5
  L1 (Signal) w0.2: D2.C 113.325,68.868 cw(c113.375,68.868) R9.1
MCU_BOOT0: R3.1 U1.44 | length 4.2
  L1 (Signal) w0.25: U1.44 93.25,89.348 93.445,89.543 R3.1
MCU_EXT_TX: J2.03 R7.1 R8.1 | length 4.5
  L1 (Signal) w0.3: R7.1 R8.1 114.897,71.907 115.599,71.205 J2.03
MCU_LED_A: D1.A U1.26 | length 7
  L1 (Signal) w0.25: U1.26@97.44,79.76 U1.26 98.275,79.75 98.875,80.35 100.504,80.35 100.65,80.204 D1.A
MCU_LED_K: D1.C R6.2 | length 1.6
  L1 (Signal) w0.25: D1.C 101.554,76.696 101.554,75.103 R6.2
MCU_M1_DIR: J5.2 U1.18 | length 18.8
  L1 (Signal) w0.2: J5.2 82.525,66.575 92.564,76.614 92.566,76.614 93.75,77.798 U1.18
MCU_M2_DIR: J5.3 U1.19 | length 18.1
  L1 (Signal) w0.2: J5.3 84.525,67.225 89.775,72.475 89.775,73.05 94.25,77.525 U1.19
MCU_M3_DIR: J5.4 U1.20 | length 17.5
  L1 (Signal) w0.2: J5.4 86.525,65.725 93.225,72.425 93.225,75.775 94.75,77.3 U1.20
MCU_M4_DIR: J5.5 U1.21 | length 16.9
  L1 (Signal) w0.2: J5.5 88.525,66.077 94.025,71.577 94.025,75.861 95.25,77.086 U1.21
MCU_M5_DIR: J5.6 U1.25 | length 20.1
  L1 (Signal) w0.2: J5.6 90.662,64.587 90.662,65.462 v1(92.275,67.075) ; U1.25 98.45,79.25 98.675,79.025 98.675,76.525 98.65,76.5 v1(98.65,76.395)
  L4 (Signal) w0.2: v1(92.275,67.075) 92.324,67.075 92.724,67.475 93.55,67.475 97.532,71.457 97.988,71.457 98.675,72.145 98.675,76.37 v1(98.65,76.395)
MCU_M6_DIR: J5.1 U1.17 | length 19.7
  L1 (Signal) w0.2: J5.1 80.65,64.575 80.65,65.8 91.844,76.994 92.409,76.994 93.25,77.835 U1.17
MCU_NRST: C3.2 J3.03 R2.2 U1.7 | length 35
  L1 (Signal) w0.25: v1(87.1,81.4) 87.6,81.4 87.95,81.75 U1.7 ; v1(98.5,86.6) 99.296,87.396 99.296,87.866 C3.2 100.493,88 100.993,88.5 101.048,88.5 101.168,88.62 R2.2 101.275,88.782 101.275,89.475 103.46,91.66 J3.03
  L4 (Signal) w0.25: v1(87.1,81.4) 86.65,81.85 86.65,84.95 88.3,86.6 v1(98.5,86.6)
MCU_OSC_IN: C1.1 U1.5 Y1.1 | length 12.6
  L1 (Signal) w0.2: Y1.1@83.6,76.6 Y1.1 83.33,76.67 C1.1 83.33,80.93 85.15,82.75 U1.5
MCU_OSC_OUT: R1.1 U1.6 | length 6.2
  L1 (Signal) w0.2: R1.1 85.857,81.257 86.85,82.25 U1.6
MCU_SWCLK: J3.04 U1.37 | length 15.3
  L1 (Signal) w0.2: U1.37 96.75,88.9 100.92,93.07 J3.04
MCU_SWDIO: J3.02 U1.34 | length 20.9
  L1 (Signal) w0.2: U1.34 97.455,83.775 101.04,83.775 106,88.735 J3.02
MCU_SWO: J3.05 U1.39 | length 14.7
  L1 (Signal) w0.2: U1.39 95.75,88.85 98.38,91.48 J3.05
MCU_TIM1_CH1: J1.1 U1.29 | length 33.5
  L1 (Signal) w0.25: U1.29 99.7,81.25 99.95,81 v1(100.25,81)
  L4 (Signal) w0.25: J1.1 75,77 100.104,77 100.25,77.146 v1(100.25,81)
MCU_TIM2_CH1: J1.2 U1.15 | length 30.1
  L1 (Signal) w0.2: J1.2 73.846,80.154 73.846,80.904 73.116,81.634 73.116,82.366 73.634,82.884 74.366,82.884 80.5,76.75 80.5,75 82.9,72.6 85.425,72.6 90.579,77.754 91.88,77.754 92.215,78.089 92.215,78.535 U1.15
MCU_TIM3_CH1: J1.3 U1.16 | length 27.1
  L1 (Signal) w0.2: J1.3 78.41,77.59 78.41,75.89 82.5,71.8 85.55,71.8 91.124,77.374 92.038,77.374 92.715,78.051 92.715,78.535 U1.16
MCU_TIM4_CH2: J1.4 U1.43 | length 32.4
  L1 (Signal) w0.2: U1.43 93.75,87.65 v1(94.2,88.1)
  L4 (Signal) w0.2: J1.4 72.5,84 71.6,84.9 71.6,88.7 71.784,88.884 83.471,88.884 84.255,88.1 v1(94.2,88.1)
MCU_TIM5_CH1: J1.5 U1.10 | length 21.4
  L1 (Signal) w0.2: v1(88.475,78) 88.583,78 88.733,78.149 88.774,78.149 89.65,79.025 89.65,80 89.865,80.215 90.535,80.215 U1.10
  L4 (Signal) w0.2: J1.5 80.475,86 v1(88.475,78)
MCU_TIM9_CH1: J1.6 U1.12 | length 38.6
  L1 (Signal) w0.2: v1(88,76.395) 90.152,78.547 90.152,79.085 90.235,79.167 90.235,79.215 90.27,79.25 U1.12
  L4 (Signal) w0.2: J1.6 72.917,88 72.8,87.883 72.8,85.3 73.216,84.884 74.366,84.884 74.884,84.366 74.884,79.634 74.366,79.116 73.512,79.116 73.116,78.72 73.116,76.809 77.45,72.475 86.025,72.475 88,74.45 v1(88,76.395)
MCU_USART1_RX: J2.04 U1.31 | length 23
  L1 (Signal) w0.3: U1.31 103.025,82.25 v1(105.65,79.625) ; v1(113.45,77.9) 115.8,75.55 J2.04
  L4 (Signal) w0.3: v1(105.65,79.625) 105.725,79.625 107.45,77.9 v1(113.45,77.9)
MCU_USART1_TX: R7.2 U1.30 | length 18.9
  L1 (Signal) w0.3: U1.30 101.05,81.75 104.225,78.575 v1(104.3,78.575) ; v1(110.7,74.025) 110.781,74.025 110.963,74.207 R7.2
  L4 (Signal) w0.3: v1(104.3,78.575) 104.3,78.5 108.775,74.025 v1(110.7,74.025)
MCU_VCAP1: C11.2 U1.22 | length 4.2
  L1 (Signal) w0.25: C11.2 95.23,76.33 95.75,76.85 U1.22
USB_D_N: J4.2 U1.32 | length 16.2
  L1 (Signal) w0.322: U1.32@97.704,82.763 106.162,82.763 113.837,82.763 J4.2
USB_D_P: J4.3 U1.33 | length 16.5
  L1 (Signal) w0.322: U1.33 97.446,83.266 113.351,83.266 113.435,83.35 J4.3
VBUS: C16.1 FL1.1 J4.1
XTAL_IN: C2.1 R1.2 Y1.3 | length 7.5
  L1 (Signal) w0.2: R1.2 84.957,80.186 84.957,78.714 C2.1 84.97,78.67 86.3,77.34 86.3,74.417 86.183,74.3 Y1.3
pads on no net: J4.4 J4.S1 J4.S2 J4.S3 J4.S4 J4.S5 J4.S6 J5.7 J5.8 U1.2 U1.3 U1.4 U1.11 U1.13 U1.14 U1.27 U1.28 U1.38 U1.40 U1.41 U2.2 U2.3 U2.4 U2.5 U2.6 U2.7 U2.14 U2.15 U2.16 U2.17 U2.19 U2.21 U2.22 Y1.2 Y1.4

## Polygon pours and split planes (outlines as drawn)
+5V on L1 (Signal) "VBUS" (solid, pour order 3): 108.35,80.159 102.675,73.846 102.675,72.475 103.85,71.3 103.85,70.1 104.125,69.825 104.925,69.825 105.1,70 105.1,71.375 104.9,71.575 104.45,71.575 103.9,72.125 103.9,74.05 106.475,75.525 106.975,77.65 107.575,78.25 108.525,78.25 108.625,78.35 108.625,78.975 109.65,80.325 109.65,82.025 108.35,82.025
GND on L1 (Signal) "5v" (solid, pour order 10): 109.6,71.325 110.65,70.275 111.675,70.275 112.375,69.575 112.375,67.825 112.175,67.65 112.15,67.65 110.675,67.65 110.5,67.825 110.5,69.025 109.55,69.025 108.625,69.95 108.6,70.025 108.6,70.75 108.375,71 107.625,71.875 106.812,72.212 106.412,72.212 106.275,72.35 104.475,72.35 104.4,72.425 104.4,73.9 104.475,73.975 105.85,73.975 106.737,74.862 107.475,76 107.475,77.55 107.575,77.675 111.125,77.65 111.25,77.5 111.25,75.15 110.275,75.15 109.575,74
+3V3 on L1 (Signal) "5v" (solid, pour order 4): 106.425,71.275 106.35,71.2 106.325,71.2 106.325,70 106.375,69.95 106.375,65.775 105.125,64.525 105.125,63.225 105.2,63.15 108.425,63.15 108.7,63.425 108.7,64.725 109.325,64.725 110.55,65.95 112.125,65.95 112.2,66.025 112.2,67.075 112.1,67.175 108.625,67.175 107.3,68.5 107.3,71.2 107.225,71.275
VBUS on L1 (Signal) "VBUS_L01_P002" (solid, pour order 2): 110.275,82.275 109.975,81.975 109.975,78.15 111.125,78.15 111.375,78.4 111.375,81.45 111.75,81.825 114.2,81.825 114.2,82.15 114.075,82.275
GND on L2 (GND) "5v" (solid, pour order 11): 72.6,102.35 71.919,101.669 ccw(c73.715,99.873) 71.175,99.873 71.175,57.55 ccw(c71.658,57.55) 71.316,57.209 72.875,55.65 ccw(c74.444,57.219) 74.444,55 114.617,55 ccw(c114.617,55.683) 115.1,55.2 117.292,57.392 ccw(c116.609,58.075) 117.575,58.075 117.575,99.723 ccw(c115.035,99.723) 116.831,101.519 115.55,102.8
GND on L3 (GND) "5v" (solid, pour order 12): 72.65,102.35 71.944,101.644 ccw(c73.74,99.848) 71.2,99.848 71.2,57.525 ccw(c71.622,57.525) 71.324,57.226 72.914,55.636 ccw(c74.45,57.173) 74.45,55 114.557,55 ccw(c114.557,55.768) 115.1,55.225 117.274,57.399 ccw(c116.549,58.125) 117.575,58.125 117.575,99.748 ccw(c115.035,99.748) 116.831,101.544 115.575,102.8

## Silkscreen, mask and mechanical layers (free items; w line width, h text height)
Top Overlay:
  text "SWD" at 100.104,95.279 h1.52
  text "USB" at 112.379,88.654 h1.52
  text "M_PWM" at 71.979,72.633 h1.52
  text "M_DIR" at 84.404,67.358 h1.52
  text "LS_SimrigController_V1.0" at 78.054,57.137 h1.52
Mechanical 1:
  lines w0.254: 118,58.2 cw(c115.163,58.2) 117.169,56.194 116.228,55.253 cw(c115.014,56.466) 115.014,54.75 73.295,54.75 cw(c73.295,57.816) 71.127,55.648 70.583,56.192 cw(c71.992,57.6) 70,57.6 70,95 70,99.8 cw(c72.837,99.8) 70.831,101.806 71.369,102.344 cw(c73.375,100.338) 73.375,103.175 115.25,103.175 cw(c115.25,101.063) 116.744,102.556 117.475,101.825 cw(c116.208,100.558) 118,100.558 118,99.475 118,58.2 ; 118,58.2 118,58.2

## Text inside footprints (layer, text, board x,y; h text height)
J4: Mechanical 13 "PCB EDGE" at 117.81,87.85 h0.41 r90